# Altium PCB USB_Hub_V1.PcbDoc
Units mm, origin at the board's own origin, x right, y up, seen from the top; angles counter-clockwise.
Board outline 64 x 56 mm, 2 copper layers (Top Layer, Bottom Layer); 20 components, 19 nets, 84 pads, 111 vias.
Unrouted connection lines stored in the file: 2.
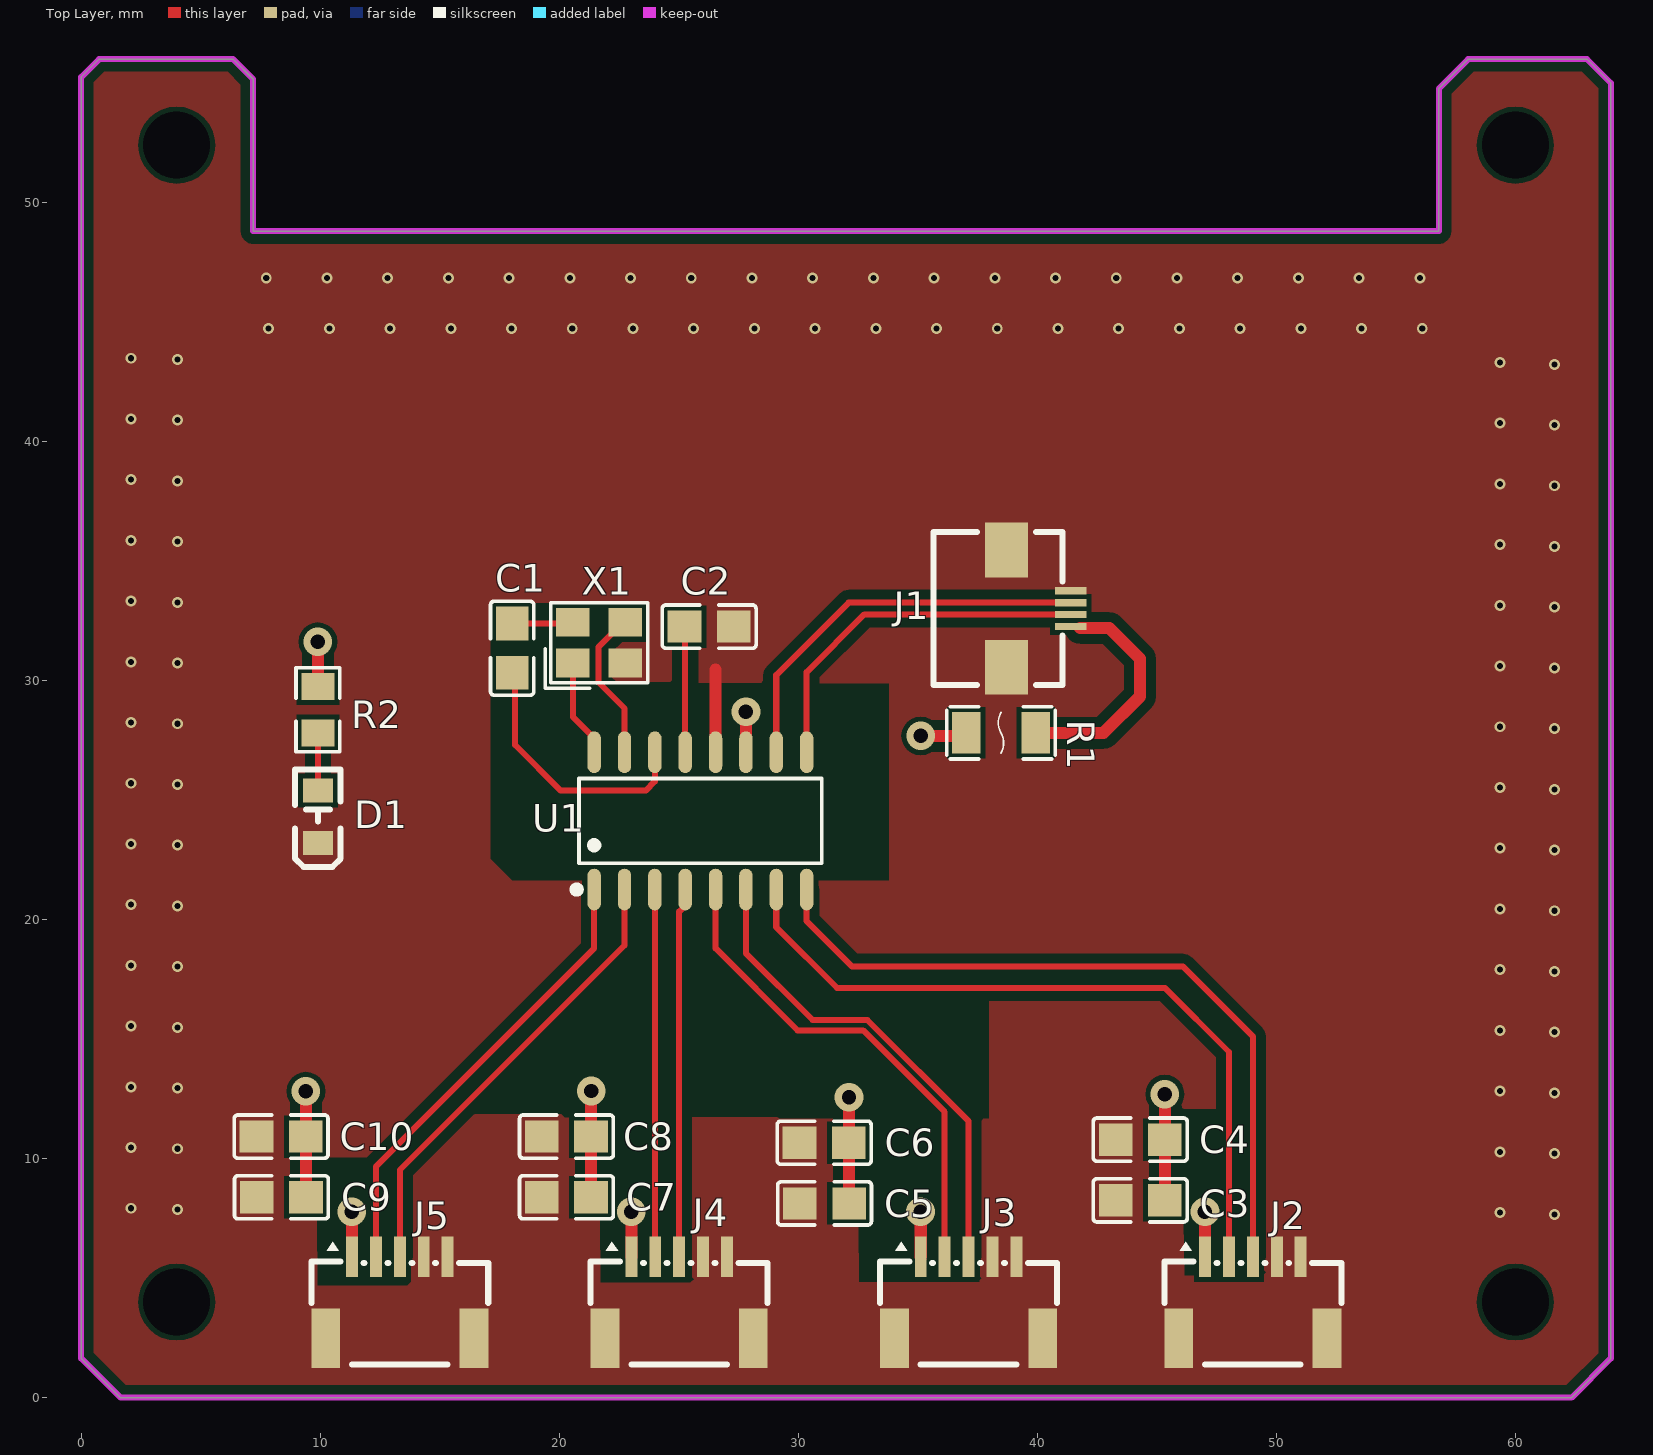
[diagram p0: Top Layer view]
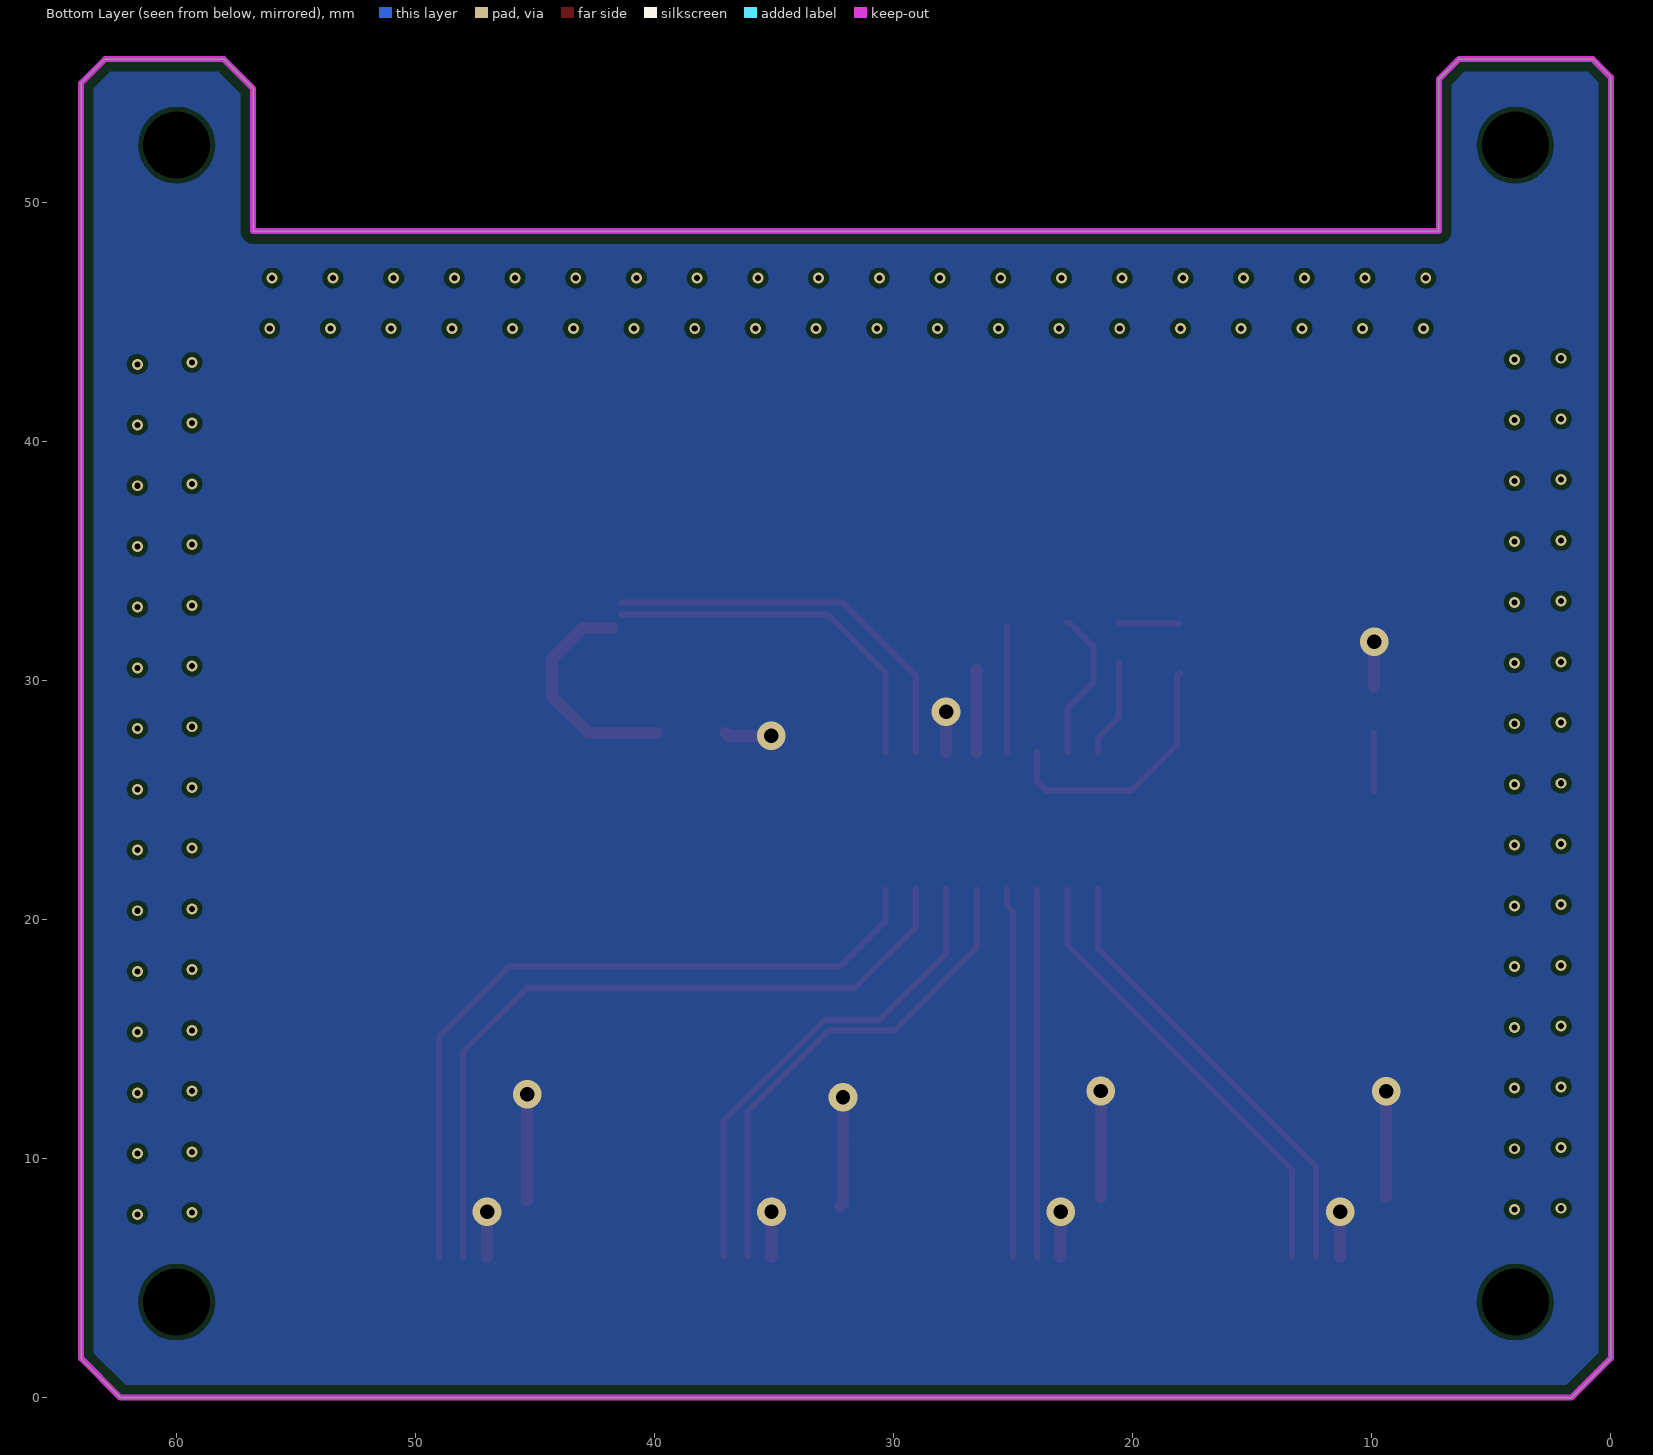
[diagram p1: Bottom Layer view, seen from below]

## Layer stack, top to bottom
Top Solder: solder mask 0.0102, Solder Resist, Dk 3.5
Top Layer: signal copper 0.0356
Dielectric 1: dielectric 0.32, FR-4, Dk 4.8
Bottom Layer: signal copper 0.0356
Bottom Solder: solder mask 0.0102, Solder Resist, Dk 3.5

## Board outline
0,1.651 0,55.245 0.755,56 6.357,56 7.2,55.157 7.2,48.8 56.8,48.8 56.8,54.768 58.032,56 62.999,56 64,54.999 64,54.991 64,1.643 62.357,0 1.651,0

## Design rules (kind name [scope] priority, off if disabled: settings)
Clearance [All] p1: gap=0.2 ignorepadtopadclearanceinfootprint=FALSE except(0: Arc-Hole Track-Hole SMDPad-Hole THPad-Hole Via-Hole Fill-Hole Poly-Hole Region-Hole Text-Hole; 0.1: Arc-SMDPad Track-SMDPad SMDPad-SMDPad; 0.18: Arc-Arc Arc-Track Arc-THPad Arc-Via Arc-Text Track-Track Track-THPad Track-Via Track-Text; 0.4: Arc-Fill Arc-Poly Arc-Region Track-Fill Track-Poly Track-Region; 0.5: THPad-THPad THPad-Via Via-Via)
HoleSize [All] p1: absolutevalues=TRUE maxlimit=3 minlimit=0.025 maxpercent=80.000 minpercent=20.000
HoleToHoleClearance [All] p1: gap=0.305 allowstackedmicrovias=TRUE
MinimumSolderMaskSliver [All] p1: minsoldermaskwidth=0.099
PasteMaskExpansion [All] p1: expansion=0.05
PlaneClearance [All] p1: clearance=0.5
PlaneConnect [All] p1: planeconnectstyle=Direct reliefexpansion=0.508 reliefentries=4 reliefconductorwidth=0.254 reliefairgap=0.254
PolygonConnect [All] p1: connectstyle=Direct reliefconductorwidth=0.254 reliefentries=4 polygonreliefangle="90 Angle" airgapwidth=0.254
RoutingVias SideHole [InNet('No Net')] p1: holewidth=0.254 width=0.457 viastyle="Through Hole" minholewidth=0.203 minwidth=0.381 maxholewidth=0.305 maxwidth=0.508
RoutingVias [InNet('VCC 5V')] p2: holewidth=0.6 width=1.2 viastyle="Through Hole" minholewidth=0.6 minwidth=1.2 maxholewidth=0.6 maxwidth=1.2
SilkToSilkClearance [All] p1: silktosilkclearance=0.051
SilkToSolderMaskClearance [IsPad] p1: minsilkscreentomaskgap=0.102 clearancetoexposedcopper=TRUE
SolderMaskExpansion [All] p1: expansion=0.05 istentingtop=FALSE soldermaskfromhole=TRUE
UnRoutedNet [All] p1: checkbadconnections=TRUE
Width PWR_idth [InNetClass('PWR')] p1: maxlimit=0.508 minlimit=0.381 preferedwidth=0.508 minimp=50.000000 maximp=50.000000 favimp=50.000000
Width [All] p2: maxlimit=0.254 minlimit=0.254 preferedwidth=0.254
21 further rules are at their usual default settings.

## Classes and differential pairs
net class PWR: GND "VBUS 5V" "VCC 5V"

## Components (designator, comment, footprint, x,y, rotation, side; value= is the part's Value field where it differs from the comment)
C1 "CAP0805" C0805 18.034,31.355 r90 top locked
C2 "CAP0805" C0805 26.275,32.258 r0 top locked
C3 "CAP0805" C0805 44.309,8.255 r0 top locked
C4 "CAP0805" C0805 44.309,10.795 r0 top locked
C5 "CAP0805" C0805 31.101,8.128 r0 top locked
C6 "CAP0805" C0805 31.087,10.668 r0 top locked
C7 "CAP0805" C0805 20.306,8.382 r0 top locked
C8 "CAP0805" C0805 20.306,10.922 r0 top locked
C9 "CAP0805" C0805 8.382,8.382 r0 top locked
C10 "CAP0805" C0805 8.368,10.922 r0 top locked
D1 "LED0805-RD" LED0805-RD 9.906,24.3 r90 top locked
J1 "AFC01-S04FCC-00" FFC-SMD_4P-P0.50_AFC01-S04FCC-00 40.062,33.008 r270 top
J2 "WAFER-SH1.0-5PWB" CONN-SMD_5P-P1.00_XUNPU_WAFER-SH1.0-5PWB 49.022,4.191 r0 top locked
J3 "WAFER-SH1.0-5PWB" CONN-SMD_5P-P1.00_XUNPU_WAFER-SH1.0-5PWB 37.126,4.191 r0 top locked
J4 "WAFER-SH1.0-5PWB" CONN-SMD_5P-P1.00_XUNPU_WAFER-SH1.0-5PWB 25.019,4.191 r0 top locked
J5 "WAFER-SH1.0-5PWB" CONN-SMD_5P-P1.00_XUNPU_WAFER-SH1.0-5PWB 13.335,4.191 r0 top locked
R1 "TLC F1206" F1206 38.484,27.813 r180 top locked
R2 "RES0805" R0805 9.906,28.779 r90 top locked
U1 "SL2.1A" SOP-16_L10.0-W3.9-P1.27-LS6.0-BL 25.908,24.13 r0 top locked
X1 "OSC CRYSTAL-SMD_4P-L3.2-W2.5-BL" CRYSTAL-SMD_4P-L3.2-W2.5-BL 21.674,31.584 r0 top locked

## Footprints (in the part's own frame and the unit in brackets; to place one, negate y for a bottom-side part, rotate by r counter-clockwise, add the part's x,y. Pads: shape width x height; smd on the part's side, far side on the other; paste and mask are expansions set on the pad)
C0805 [mm]
  rect 1.41x1.35 smd paste-100 mask+0.051: 1(-1.03,0) 2(1.03,0)
  silkscreen extent -1.96,-0.9 1.96,0.9
CONN-SMD_5P-P1.00_XUNPU_WAFER-SH1.0-5PWB [mm]
  rect 0.5x1.7 smd paste+0 mask+0.05: 1(-2,1.7) 2(-1,1.7) 3(0,1.7) 4(1,1.7) 5(2,1.7)
  rect 1.2x2.5 smd paste+0 mask+0.05: 6(3.1,-1.7) 7(-3.1,-1.7)
  silkscreen extent -3.7,-2.8 3.7,2.34
CRYSTAL-SMD_4P-L3.2-W2.5-BL [mm]
  rect 1.4x1.2 smd paste+0 mask+0.051: 1(-1.1,-0.85) 2(1.1,-0.85) 3(1.1,0.85) 4(-1.1,0.85)
  silkscreen extent -2.26,-1.91 2.03,1.68
F1206 [mil]
  rect 46.9x68 smd paste+0 mask+2: 1(-56.9,0) 2(56.9,0)
  silkscreen extent -89,-43 89,43
FFC-SMD_4P-P0.50_AFC01-S04FCC-00 [mm]
  rect 0.3x1.3 smd paste+0 mask+0.05: 1(-0.75,1.34) 2(-0.25,1.34) 3(0.25,1.34) 4(0.75,1.34)
  rect 2.3x1.8 smd: 5(2.45,-1.34) 6(-2.45,-1.34)
  silkscreen extent -3.2,-4.4 3.2,1
LED0805-RD [mm]
  rect 1x1.25 smd paste+0 mask+0.051: 1(-1.1,0) 2(1.1,0)
  silkscreen extent -2.1,-0.95 1.98,0.96
R0805 [mm]
  rect 1.133x1.377 smd paste-100 mask+0.051: 1(-0.966,0) 2(0.966,0)
  silkscreen extent -1.76,-0.92 1.76,0.92
SOP-16_L10.0-W3.9-P1.27-LS6.0-BL [mm]
  oval 0.56x1.745 smd paste+0 mask+0.051: 1(-4.445,-2.872) 2(-3.175,-2.872) 3(-1.905,-2.872) 4(-0.635,-2.872) 5(0.635,-2.872) 6(1.905,-2.872) 7(3.175,-2.872) 8(4.445,-2.872) 9(4.445,2.872) 10(3.175,2.872) 11(1.905,2.872) 12(0.635,2.872) 13(-0.635,2.872) 14(-1.905,2.872) 15(-3.175,2.872) 16(-4.445,2.872)
  silkscreen extent -5.33,-3.02 5.08,1.77

## Part data
C1 C2 C3 C4 C5 C6 C7 C8 C9 C10: "0805贴片电容", JLCPCB Part Class="Extended Part", LCSC Part Name="100nF ±10% 50V", Manufacturer=SAMSUNG(三星), Manufacturer Part=CL21B104KBCNNNC, Temperature Coefficient=X7R, Tolerance=±10%, Voltage Rated=50V, Add into BOM=yes, Convert to PCB=yes, Datasheet=https://atta.szlcsc.com/upload/public/pdf/source/20160103/1457707693305.pdf, Device=CL21B104KBCNNNC, Supplier=LCSC, Supplier Footprint=0805, Supplier Part=C1711, Symbol=CL21B104KBCNNNC
D1: "蓝光LED", Color Temperature=-, Forward Current=20mA, Forward Voltage (VF)=3.3V, JLCPCB Part Class="Extended Part", LCSC Part Name=LED贴片0805超高亮蓝光, Lens Color=无色透明, Manufacturer=MEIHUA(美华科技), Manufacturer Part=MHT170UBCT, Operating Temperature=-40~+85, Power Dissipation=95mW, Add into BOM=yes, Convert to PCB=yes, Datasheet=https://atta.szlcsc.com/upload/public/pdf/source/20190515/C389525_9DDE5770D44EFFE682D3E1E38A61D6F4.pdf, Device=MHT170UBCT, Diode Configuration=-, Dominant Wavelength=460nm~475nm, Luminous Flux (@25℃)=-, Luminous Intensity=225mcd, Mounting Sytle=-, Peak Wavelength=468nm, Supplier=LCSC, Supplier Footprint=0805, Supplier Part=C389525, Symbol=MHT170UBCT, Viewing Angle=140°
J1: library part "FPC AFC01-S04FCC-00", "4pin FPC接口", JLCPCB Part Class="Extended Part", LCSC Part Name="间距:0.5mm P数:4P 翻盖式 下接", Manufacturer=JS(钜硕电子), Add into BOM=yes, Contact Type=下接, Convert to PCB=yes, Datasheet=https://atta.szlcsc.com/upload/public/pdf/source/20190816/C413942_2A72D1AC756EAE17EEDF756A339D4500.pdf, Device=AFC01-S04FCC-00, FFC, FCB Thickness=0.3mm, Height Above Board=2mm, Locking Feature=翻盖式, Manufacturer Part=AFC01-S04FCC-00, Mounting Type=卧贴, Number of Contacts=4P, Pitch=0.5mm, Supplier=LCSC, Supplier Footprint=SMD,P=0.5mm,卧贴, Supplier Part=C262260, Symbol=AFC01-S04FCC-00
J2 J3 J4 J5: library part SH1.0-5pin, "SH1.0 5pin 母头端子", Current Rating (Max)=1A, JLCPCB Part Class="Extended Part", LCSC Part Name="1x5P 间距:1mm 卧贴", Manufacturer=XUNPU(讯普), Operating Temperature Range=-25℃~+85℃, Add into BOM=yes, Convert to PCB=yes, Datasheet=https://atta.szlcsc.com/upload/public/pdf/source/20220527/1879B8210BD3B2006BCEAC1A40D397B6.pdf, Device=WAFER-SH1.0-5PWB, Manufacturer Part=WAFER-SH1.0-5PWB, Mounting Style=卧贴, Number of Pins=5P, Number of PINs Per Row=5, Number of Rows=1, Pins Structure=1x5P, Pitch=1mm, Supplier=LCSC, Supplier Footprint=SMD,P=1mm,卧贴, Supplier Part=C3029344, Symbol=WAFER-SH1.0-5PWB
R1: "保险丝", Current Rating (Max)=100A, Hold Current=1A, JLCPCB Part Class="Extended Part", LCSC Part Name="6V 1A 自恢复", Manufacturer=TLC(竞沃), Manufacturer Part=TLC-NSMD100, Operating Temperature=-40~+85, Operating Voltage (Max)=6V, Power Dissipation=600mW, Resistance - Initial (Ri) (Min)=-, Trip Current=2A, Add into BOM=yes, Convert to PCB=yes, Datasheet=https://atta.szlcsc.com/upload/public/pdf/source/20180802/C261954_CE31CE21EEB143DB51778C363DF0F083.pdf, Device=TLC-NSMD100, Maximum Time to Trip=100ms, Resistance - Post Trip (R1) (Max)=-, Supplier=LCSC, Supplier Footprint=1206, Supplier Part=C261954, Symbol=TLC-NSMD100
R2: "0805贴片电阻", JLCPCB Part Class="Extended Part", LCSC Part Name="1kΩ ±5%", Manufacturer=FH(风华), Manufacturer Part=RS-05K102JT, Operating Temperature Range=-55~+155, Overload Voltage (Max)=150V, Power(Watts)=125mW, Temperature Coefficient=±100ppm/, Tolerance=±5%, Add into BOM=yes, Convert to PCB=yes, Datasheet=https://atta.szlcsc.com/upload/public/pdf/source/20170704/1499151304704.pdf, Device=RS-05K102JT, Supplier=LCSC, Supplier Footprint=0805, Supplier Part=C115302, Symbol=RS-05K102JT
U1: "USB 2.0接口4口HUB芯片", JLCPCB Part Class="Extended Part", Manufacturer=CoreChips(和芯润德), Supply Voltage=-, Add into BOM=yes, Convert to PCB=yes, Data Rate=-, Datasheet=https://atta.szlcsc.com/upload/public/pdf/source/20180522/C192893_624110D24898D57AAC785E3DF98EA862.pdf, Device=SL2.1A, LCSC Part Name=SL2.1A, Manufacturer Part=SL2.1A, Number of Drivers/Receivers=-, Protocol=-, Supplier=LCSC, Supplier Footprint=SOP-16_150mil, Supplier Part=C192893, Symbol=SL2.1A, Type=-
X1: "晶振", Equivalent Series Resistance (ESR)=80Ω, Frequency Stability=-, Frequency Tolerance=±10ppm, JLCPCB Part Class="Extended Part", LCSC Part Name="12MHz ±10ppm 20pF", Load Capacitance=20pF, Manufacturer=JGHC(晶光华), Manufacturer Part=S3212000201080, Operating Temperature=-40~+85, Add into BOM=yes, Convert to PCB=yes, Crystal Type=贴片无源晶振, Datasheet=https://atta.szlcsc.com/upload/public/pdf/source/20191012/C426972_E2C41F8C78BF72E52773F7737EA32F83.pdf, Device=S3212000201080, Supplier=LCSC, Supplier Footprint=SMD3225-4P, Supplier Part=C426972, Symbol=S3212000201080

## Free pads (board coordinates)
  round 1.524 hole 2.8 mask+0.9: 7(4,4) 7(4,52.4) 7(60,4) 7(60,52.4)

## Via types
v1: diameter 0.457, hole 0.254, Top Layer to Bottom Layer, 100 vias
v2: diameter 1.2, hole 0.6, Top Layer to Bottom Layer, 11 vias

## Nets (pads, with @x,y where several pads share a name; then routed paths per layer and width w, separated by ;. In a path a pad name is that pad's centre, name@x,y a point inside that pad or via, vN(x,y) a via of type N, cw(c..) or ccw(c..) an arc to the next point about the centre after c; other vN are vias at no path point)
DM: J1.3 U1.9 | length 15.4
  Top Layer w0.254: U1.9 30.353,30.353 32.766,32.766 41.394,32.766 J1.3
DM1: J2.2 U1.7 | length 31.2
  Top Layer w0.254: U1.7 29.083,19.685 31.623,17.145 45.339,17.145 48.022,14.462 J2.2
DM2: J3.2 U1.5 | length 20.9
  Top Layer w0.254: U1.5 26.543,18.796 29.972,15.367 32.713,15.367 36.126,11.954 J3.2
DM3: J4.2 U1.3 | length 16
  Top Layer w0.254: U1.3@24.003,20.582 U1.3 24.011,21.249 24.011,5.899 J4.2
DM4: J5.2 U1.1 | length 19.1
  Top Layer w0.254: J5.2 12.335,9.668 21.463,18.796 U1.1
DP: J1.2 U1.10 | length 16.8
  Top Layer w0.254: U1.10 29.083,30.226 32.115,33.258 J1.2
DP1: J2.3 U1.8 | length 31.2
  Top Layer w0.254: U1.8 30.353,19.939 32.258,18.034 46.101,18.034 49.022,15.113 J2.3
DP2: J3.3 U1.6 | length 20.6
  Top Layer w0.254: U1.6 27.813,18.592 30.604,15.801 32.893,15.801 37.126,11.568 J3.3
DP3: J4.3 U1.4 | length 15.5
  Top Layer w0.254: J4.3 25.019,20.328 25.273,20.582 U1.4
DP4: J5.3 U1.2 | length 19.3
  Top Layer w0.254: J5.3 13.335,9.525 22.733,18.923 U1.2
GND: C2.2 C3.1 C4.1 C5.1 C6.1 C7.1 C8.1 C9.1 C10.1 D1.1 J1.1 J1.5 J1.6 J2.4 J2.5 J2.6 J2.7 J3.4 J3.5 J3.6 J3.7 J4.4 J4.5 J4.6 J4.7 J5.4 J5.5 J5.6 J5.7 U1.12 X1.2 | length 3.5
  Top Layer w0.508: U1.12 26.543,30.455
  other v1: 61.646,7.671 59.36,7.747 4.039,7.874 2.083,7.925 61.646,10.211 59.36,10.287 4.039,10.414 2.083,10.465 61.646,12.751 59.36,12.827 4.039,12.954 2.083,13.005 61.646,15.291 59.36,15.367 4.039,15.494 2.083,15.545 61.646,17.831 59.36,17.907 4.039,18.034 2.083,18.085 61.646,20.371 59.36,20.447 4.039,20.574 2.083,20.625 61.646,22.911 59.36,22.987 4.039,23.114 2.083,23.165 61.646,25.451 59.36,25.527 4.039,25.654 2.083,25.705 61.646,27.991 59.36,28.067 4.039,28.194 2.083,28.245 61.646,30.531 59.36,30.607 4.039,30.734 2.083,30.785 61.646,33.071 59.36,33.147 4.039,33.274 2.083,33.325 61.646,35.611 59.36,35.687 4.039,35.814 2.083,35.865 61.646,38.151 59.36,38.227 4.039,38.354 2.083,38.405 61.646,40.691 59.36,40.767 4.039,40.894 2.083,40.945 61.646,43.231 59.36,43.307 4.039,43.434 2.083,43.485 7.849,44.729 10.389,44.729 12.929,44.729 15.469,44.729 18.009,44.729 20.549,44.729 23.089,44.729 25.629,44.729 28.169,44.729 30.709,44.729 33.249,44.729 35.789,44.729 38.329,44.729 40.869,44.729 43.409,44.729 45.949,44.729 48.489,44.729 51.029,44.729 53.569,44.729 56.109,44.729 7.747,46.838 10.287,46.838 12.827,46.838 15.367,46.838 17.907,46.838 20.447,46.838 22.987,46.838 25.527,46.838 28.067,46.838 30.607,46.838 33.147,46.838 35.687,46.838 38.227,46.838 40.767,46.838 43.307,46.838 45.847,46.838 48.387,46.838 50.927,46.838 53.467,46.838 56.007,46.838
NetC1_1: C1.1 U1.14 | length 11.1
  Top Layer w0.254: C1.1 18.161,30.198 18.161,27.305 20.066,25.4 23.622,25.4 24.003,25.781 U1.14
NetC1_2: C1.2 X1.4 | length 2.6
  Top Layer w0.254: C1.2 20.525,32.385 X1.4
NetC2_1: C2.1 U1.13 | length 5.3
  Top Layer w0.254: C2.1 25.273,32.23 U1.13
NetD1_2: D1.2 R2.1 | length 2.4
  Top Layer w0.254: D1.2 R2.1
NetU1_15: U1.15 X1.3 | length 6.4
  Top Layer w0.254: U1.15 22.733,28.838 21.652,29.919 21.652,31.412 22.674,32.434 X1.3
NetU1_16: U1.16 X1.1 | length 4.1
  Top Layer w0.254: X1.1 20.574,28.484 21.463,27.595 U1.16
"VBUS 5V": J1.4 R1.1 | length 9.6
  Top Layer w0.508: R1.1 42.774,27.813 44.298,29.337 44.298,30.912 43.013,32.197 J1.4@41.798,32.197
"VCC 5V": C3.2 C4.2 C5.2 C6.2 C7.2 C8.2 C9.2 C10.2 J2.1 J3.1 J4.1 J5.1 R1.2 R2.2 U1.11 | length 31
  Top Layer w0.508: C10.2 C10.2@9.405,10.915 ; v2(9.405,12.82) C10.2@9.405,10.915 ; C9.2@9.435,8.389 9.405,8.389 C10.2@9.405,10.915 ; R2.2 v2(9.906,31.623) ; J5.1 v2@11.335,7.766 ; C7.2 C8.2 v2(21.336,12.827) ; J4.1 v2@23.019,7.766 ; U1.11 v2(27.813,28.702) ; C6.2 C6.2@32.124,10.661 ; v2(32.124,12.566) C6.2@32.124,10.661 ; C5.2@32.248,8.011 C5.2 32.124,8.135 C6.2@32.124,10.661 ; J3.1 v2@35.126,7.766 ; v2(35.128,27.686) 36.911,27.686 R1.2 ; v2(45.339,12.7) C4.2 C3.2 C3.2@45.369,8.255 ; J2.1 v2@47.022,7.766
  other v2: 11.328,7.772 23.012,7.772 35.12,7.772 47.015,7.772

## Polygon pours and split planes (outlines as drawn)
"VCC 5V" on Bottom Layer "VCC_5V_L02_P002" (solid, pour order 2): 0,1.651 0,55.245 0.755,56 6.357,56 7.2,55.157 7.2,48.8 56.8,48.8 56.8,54.768 58.032,56 62.999,56 64,54.999 64,54.991 64,1.643 62.357,0 1.651,0
GND on Top Layer "GND_L01_P003" (solid, pour order 3): 0,1.651 0,55.245 0.755,56 6.357,56 7.2,55.157 7.2,48.8 56.8,48.8 56.8,54.768 58.032,56 62.999,56 64,54.999 64,54.991 64,1.643 62.357,0 1.651,0

## Keep-outs
Keep-Out Layer:
  the board outline again, w0.254

## Other copper
Top Layer:
  pour cut-out: 18.909,33.29 18.965,33.234 19.674,33.234 19.674,32.922 18.909,32.922
  pour cut-out: 17.145,29.986 17.145,22.543 18.034,21.654 33.782,21.654 33.782,29.857
  pour cut-out: 29.21,11.684 29.134,11.76 25.527,11.76 25.527,21.641 25.502,21.666 29.235,21.666
  pour cut-out: 20.676,11.836 20.625,11.887 16.459,11.887 16.459,12.294 23.114,18.948 23.089,18.974 23.089,21.742 23.571,21.742 23.597,21.768 23.622,21.742 23.622,10.008 22.225,10.008 22.149,10.084 22.149,11.735 20.244,11.735 20.091,11.887
  pour cut-out: 21.209,33.21 22.034,33.21 22.034,32.004 21.336,32.004
  pour cut-out: 17.145,31.877 19.939,31.877 19.939,29.308 20.037,29.211 19.909,29.083 17.145,29.083
  pour cut-out: 29.083,18.161 29.21,18.034 29.21,11.684 37.973,11.684 37.973,18.161
  pour cut-out: 46.088,12.076 49.486,12.076 49.486,5.323 49.555,5.254 49.413,5.113 46.164,5.113
  pour cut-out: 32.476,11.811 37.592,11.811 37.592,5.058 37.661,4.989 37.519,4.848 32.552,4.848
  pour cut-out: 21.688,10.167 21.702,10.153 25.556,10.153 25.556,5.03 25.625,4.961 25.483,4.819 21.746,4.819
  pour cut-out: 9.847,10.047 9.861,10.033 13.716,10.033 13.716,4.91 13.785,4.841 13.643,4.699 9.906,4.699

## Silkscreen, mask and mechanical layers (free items; w line width, h text height)
Top Solder:
  drawing of 9 lines, arcs and shapes, not listed